# EAGLE board untitled (EAGLE 6.2), part 1 of 3
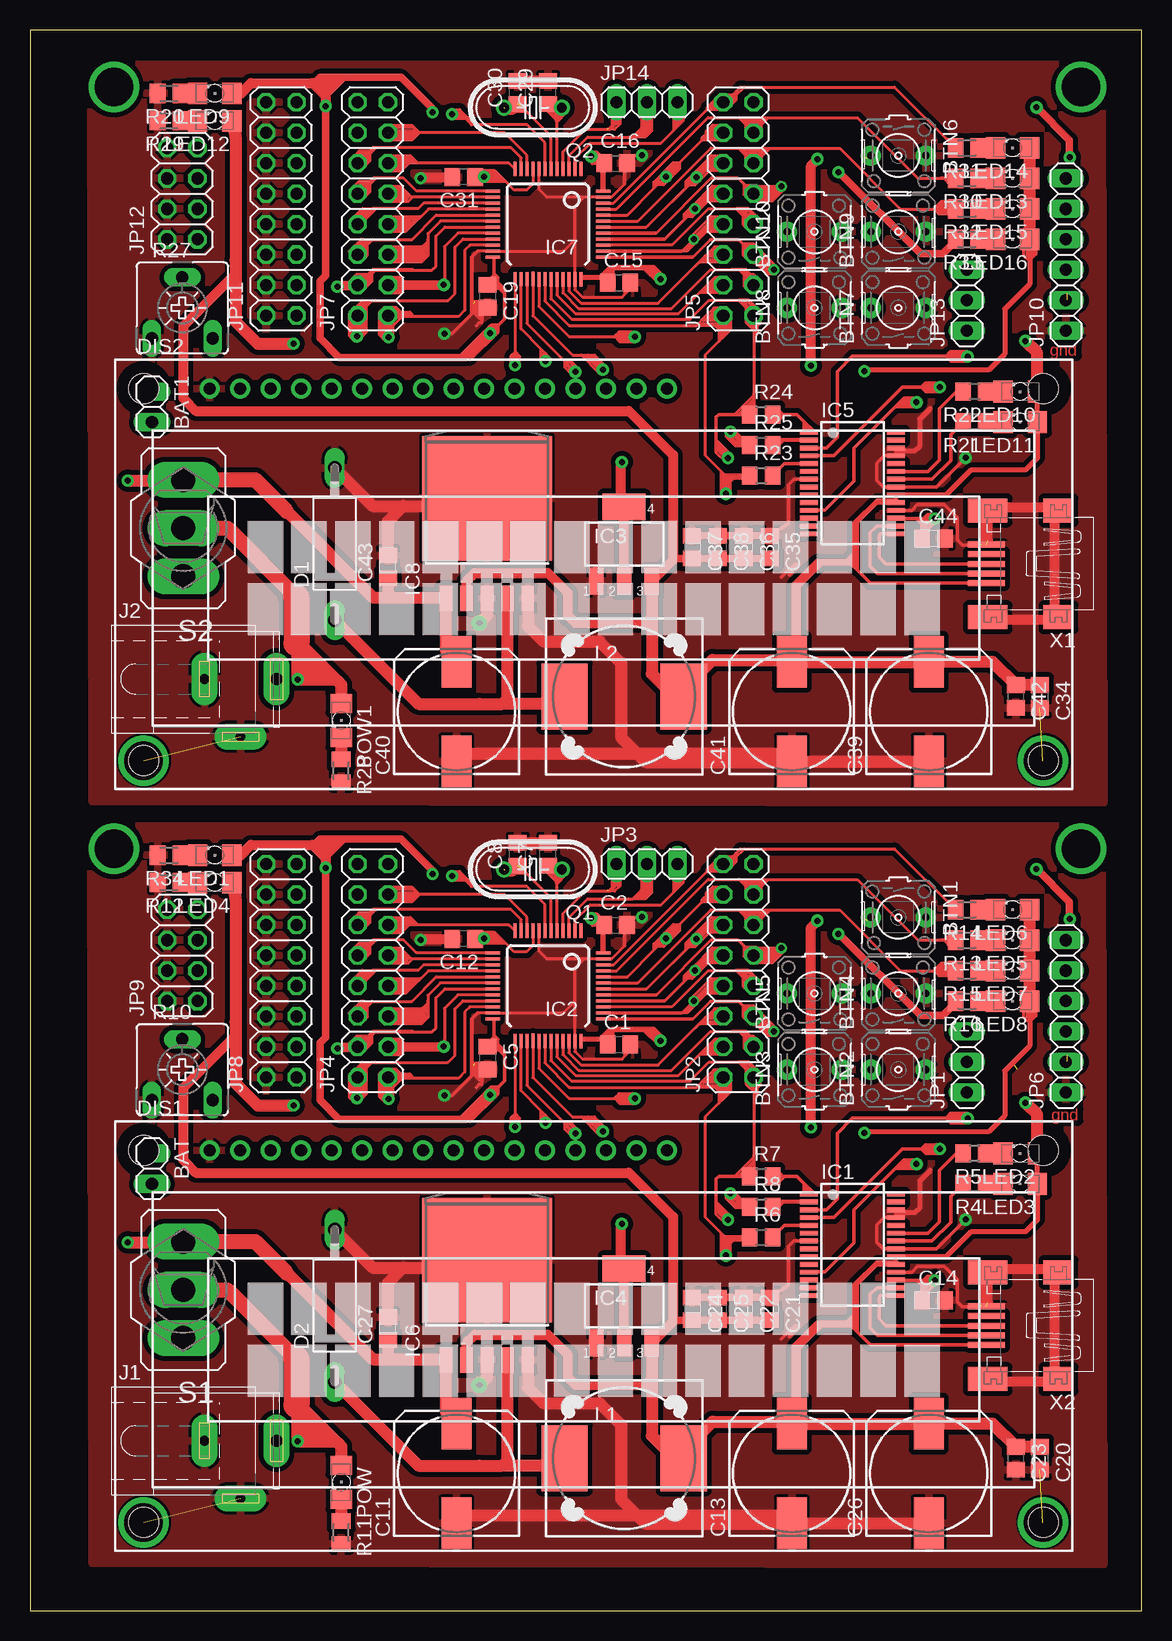
[diagram p0: board, top side]
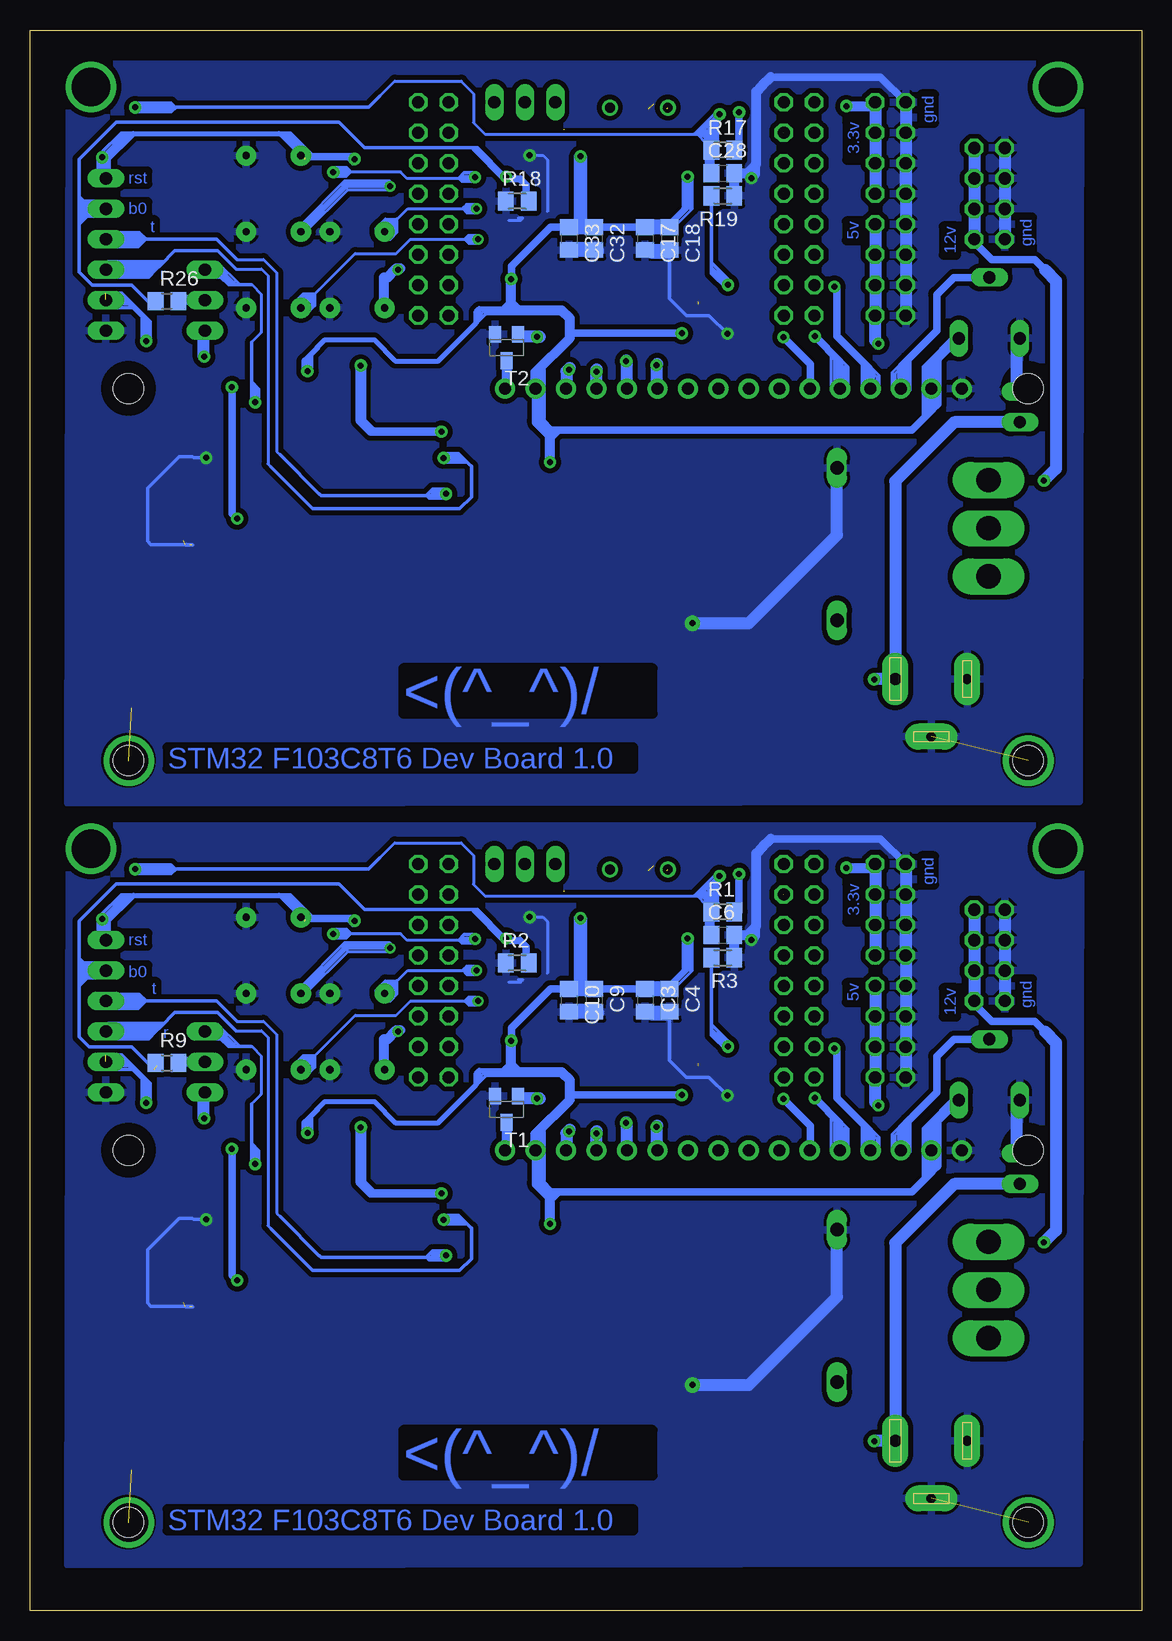
[diagram p1: board, bottom side, seen from below]

Size 92.69 x 131.75 mm. Coordinates in mm from the lower left corner, seen from the top.
Outline: 0,0 92.69,0 92.69,131.75 0,131.75 0,0
Copper layers (1*16): Top 0.035mm / dielectric 1.5mm / Bottom 0.035mm
Design rules: minimum track width 10mil, minimum drill 24mil, track to track 8mil, track to pad 8mil, pad to pad 8mil, via to via 8mil, smd to smd 8mil, copper to edge 40mil, drill to drill 8mil, minimum pad ring 10mil, minimum via ring 8mil, stop-mask expansion 4mil, vias tented up to drill 0mil, thermal gap 10mil

## Footprints (pad centres in the part's own frame; a part is rotated, then mirrored left to right if it is on the bottom)
1X02 = drill 1.016 long: 1 -1.27,0; 2 1.27,0
PUSHBUTTON = drill 0.6 pad 1.676: 1 0,2.286; 2 0,-2.286
C0805 = smd 1.3 x 1.5: 1 -0.95,0; 2 0.95,0
153CLV-1012 = smd 4.3 x 2.5: + 4.15,0; - -4.15,0
DO15-12 = drill 1.118 long: A 6.35,0; C -6.35,0
TUXGR_16X2_R2 = drill 1 pad 1.676: 1 -32,15.5; 2 -29.46,15.5; 3 -26.92,15.5; 4 -24.38,15.5; 5 -21.84,15.5; 6 -19.3,15.5; 7 -16.76,15.5; 8 -14.22,15.5; 9 -11.68,15.5; 10 -9.14,15.5; 11 -6.6,15.5; 12 -4.06,15.5; 13 -1.52,15.5; 14 1.02,15.5; 15 3.56,15.5; 16 6.1,15.5 | hole 2.5: -37.5,-15.5; 37.5,-15.5; -37.5,15.5; 37.5,15.5
SSOP28 = smd 0.4 x 1.5: 1 -4.225,-3.625; 2 -3.575,-3.625; 3 -2.925,-3.625; 4 -2.275,-3.625; 5 -1.625,-3.625; 6 -0.975,-3.625; 7 -0.325,-3.625; 8 0.325,-3.625; 9 0.975,-3.625; 10 1.625,-3.625; 11 2.275,-3.625; 12 2.925,-3.625; 13 3.575,-3.625; 14 4.225,-3.625; 15 4.225,3.625; 16 3.575,3.625; 17 2.925,3.625; 18 2.275,3.625; 19 1.625,3.625; 20 0.975,3.625; 21 0.325,3.625; 22 -0.325,3.625; 23 -0.975,3.625; 24 -1.625,3.625; 25 -2.275,3.625; 26 -2.925,3.625; 27 -3.575,3.625; 28 -4.225,3.625
TQFP48 = smd 0.2 x 1: 1 -2.75,-4.5; 2 -2.25,-4.5; 3 -1.75,-4.5; 4 -1.25,-4.5; 5 -0.75,-4.5; 6 -0.25,-4.5; 7 0.25,-4.5; 8 0.75,-4.5; 9 1.25,-4.5; 10 1.75,-4.5; 11 2.25,-4.5; 12 2.75,-4.5; 25 2.75,4.495; 26 2.25,4.494; 27 1.751,4.515; 28 1.25,4.482; 29 0.753,4.499; 30 0.251,4.494; 31 -0.25,4.496; 32 -0.751,4.506; 33 -1.258,4.496; 34 -1.75,4.5; 35 -2.25,4.5; 36 -2.75,4.5; 49 0.752,4.496; 50 0.248,4.497; 51 -0.25,4.497; 52 -0.748,4.497; 53 2.75,4.495; 54 2.252,4.492; 55 1.749,4.5; 56 1.249,4.485 | smd 1 x 0.2: 13 4.5,-2.75; 14 4.5,-2.25; 15 4.5,-1.75; 16 4.5,-1.25; 17 4.5,-0.75; 18 4.5,-0.25; 19 4.5,0.25; 20 4.5,0.75; 21 4.5,1.25; 22 4.5,1.75; 23 4.5,2.25; 24 4.5,2.75; 37 -4.5,2.75; 38 -4.5,2.25; 39 -4.5,1.75; 40 -4.5,1.25; 41 -4.5,0.75; 42 -4.5,0.25; 43 -4.5,-0.25; 44 -4.5,-0.75; 45 -4.5,-1.25; 46 -4.5,-1.75; 47 -4.5,-2.25; 48 -4.5,-2.75; 57 -4.5,2.75; 58 -4.5,2.25; 59 -4.5,1.75; 60 -4.5,1.25; 61 -4.5,0.75; 62 -4.5,0.25; 63 -4.5,-0.25; 64 -4.5,-0.75; 65 -4.5,-1.25; 66 -4.5,-1.75; 67 -4.5,-2.25; 68 -4.5,-2.75 | smd 0.25 x 1.2: P$1 -2.75,4.597; P$2 -2.248,4.597; P$3 -1.753,4.597; P$4 -1.257,4.597; P$5 -0.749,4.597; P$6 -0.25,4.597; P$7 0.25,4.594; P$8 0.749,4.597; P$9 1.247,4.585; P$10 1.753,4.595; P$11 2.25,4.59; P$12 2.75,4.597; P$25 -2.753,-4.599; P$26 -2.25,-4.599; P$27 -1.751,-4.599; P$28 -1.25,-4.599; P$29 -0.753,-4.599; P$30 -0.251,-4.599; P$31 0.248,-4.6; P$32 0.745,-4.599; P$33 1.248,-4.599; P$34 1.746,-4.599; P$35 2.248,-4.602; P$36 2.746,-4.599 | smd 1.2 x 0.25: P$13 4.599,-2.753; P$14 4.599,-2.25; P$15 4.599,-1.751; P$16 4.599,-1.25; P$17 4.599,-0.753; P$18 4.599,-0.251; P$19 4.6,0.248; P$20 4.599,0.745; P$21 4.599,1.248; P$22 4.599,1.746; P$23 4.602,2.248; P$24 4.599,2.746; P$37 -4.599,2.75; P$38 -4.599,2.247; P$39 -4.599,1.748; P$40 -4.599,1.246; P$41 -4.599,0.749; P$42 -4.599,0.248; P$43 -4.6,-0.251; P$44 -4.599,-0.749; P$45 -4.599,-1.252; P$46 -4.599,-1.75; P$47 -4.602,-2.252; P$48 -4.599,-2.75
SOT223 = smd 1.219 x 2.235: 1 -2.311,-3.099; 2 0,-3.099; 3 2.311,-3.099 | smd 3.6 x 2.2: 4 0,3.099
TO263-5 = smd 1.067 x 2.159: 1 -3.404,-5.791; 2 -1.702,-5.791; 3 0,-5.791; 4 1.702,-5.791; 5 3.404,-5.791 | smd 10.8 x 10.41: 6 0,2.54
SPC4078 = drill 0.8 pad 2.184 long: 1 -3,0; 2 0,-4.8 | drill 1 pad 2.184 long: 3 3,0
1X03 = drill 1.016 long: 1 -2.54,0; 2 0,0; 3 2.54,0
2X08 = drill 1.016 octagon: 1 -8.89,-1.27; 2 -8.89,1.27; 3 -6.35,-1.27; 4 -6.35,1.27; 5 -3.81,-1.27; 6 -3.81,1.27; 7 -1.27,-1.27; 8 -1.27,1.27; 9 1.27,-1.27; 10 1.27,1.27; 11 3.81,-1.27; 12 3.81,1.27; 13 6.35,-1.27; 14 6.35,1.27; 15 8.89,-1.27; 16 8.89,1.27
1X06 = drill 1.016 long: 1 -6.35,0; 2 -3.81,0; 3 -1.27,0; 4 1.27,0; 5 3.81,0; 6 6.35,0
2X04 = drill 1.016 octagon: 1 -3.81,-1.27; 2 -3.81,1.27; 3 -1.27,-1.27; 4 -1.27,1.27; 5 1.27,-1.27; 6 1.27,1.27; 7 3.81,-1.27; 8 3.81,1.27
DR127 = smd 3.85 x 5.5: 1 -4.975,0; 2 4.975,0
1206 = smd 1.6 x 1.803: A -1.422,0; C 1.422,0
HC49U-V = drill 0.813: 1 -2.413,0; 2 2.413,0
M0805 = smd 1.3 x 1.6: 1 -0.95,0; 2 0.95,0
R0805 = smd 1.3 x 1.5: 1 -0.95,0; 2 0.95,0
CA6V = drill 1.016 long: A -2.54,-2.54; E 2.54,-2.54; S 0,2.54
320-916 = drill 2.007 long: 1 0,4.013; 2 0,0; 3 0,-4.013
SOT23-BEC = smd 1 x 1.4: B -0.95,-1.1; C 0,1.1; E 0.95,-1.1
32005-400 = smd 3.1 x 0.5: 1 3,1.6; 2 3,0.8; 3 3,0; 4 3,-0.8; 5 3,-1.6 | smd 2.5 x 2: M1 -3,-4.45; M2 -3,4.45 | smd 3.3 x 2: M3 2.9,4.45; M4 2.9,-4.45

## Placement (x,y rotation side)
BAT  [1X02]  10.16,36.83 270 top
BAT1  [1X02]  10.16,100.33 270 top
BTN1  PUSHBTN  [PUSHBUTTON]  72.39,57.78 270 top
BTN2  PUSHBTN  [PUSHBUTTON]  72.39,45.09 90 top
BTN3  PUSHBTN  [PUSHBUTTON]  65.41,45.09 90 top
BTN4  PUSHBTN  [PUSHBUTTON]  72.39,51.44 90 top
BTN5  PUSHBTN  [PUSHBUTTON]  65.41,51.44 90 top
BTN6  PUSHBTN  [PUSHBUTTON]  72.39,121.28 270 top
BTN7  PUSHBTN  [PUSHBUTTON]  72.39,108.59 90 top
BTN8  PUSHBTN  [PUSHBUTTON]  65.41,108.59 90 top
BTN9  PUSHBTN  [PUSHBUTTON]  72.39,114.94 90 top
BTN10  PUSHBTN  [PUSHBUTTON]  65.41,114.94 90 top
C1  100n  [C0805]  49.1,47.18 0 top
C2  100n  [C0805]  48.82,57.13 0 top
C3  100n  [C0805]  41.4,50.86 270 bottom
C4  100n  [C0805]  39.37,50.86 270 bottom
C5  10u  [C0805]  38.15,46.05 270 top
C6  [C0805]  34.92,56.32 0 bottom
C7  24p  [C0805]  43.2,63.05 90 top
C8  24p  [C0805]  40.66,63.05 90 top
C9  10u  [C0805]  45.66,50.86 270 bottom
C10  10u  [C0805]  47.75,50.86 270 bottom
C11  [153CLV-1012]  35.56,11.43 90 top
C12  10u  [C0805]  36.16,55.99 180 top
C13  [153CLV-1012]  63.5,11.43 90 top
C14  [C0805]  75.34,25.84 0 top
C15  100n  [C0805]  49.1,110.68 0 top
C16  100n  [C0805]  48.82,120.63 0 top
C17  100n  [C0805]  41.4,114.36 270 bottom
C18  100n  [C0805]  39.37,114.36 270 bottom
C19  10u  [C0805]  38.15,109.55 270 top
C20  10u  [C0805]  84.2,12.7 270 top
C21  [C0805]  61.68,25.15 270 top
C22  [C0805]  59.52,25.15 270 top
C23  [C0805]  82.17,12.7 270 top
C24  [C0805]  55.21,25.15 270 top
C25  [C0805]  57.37,25.15 270 top
C26  100u  [153CLV-1012]  74.93,11.43 90 top
C27  [C0805]  29.84,23.5 90 top
C28  [C0805]  34.92,119.82 0 bottom
C29  24p  [C0805]  43.2,126.55 90 top
C30  24p  [C0805]  40.66,126.55 90 top
C31  10u  [C0805]  36.16,119.49 180 top
C32  10u  [C0805]  45.66,114.36 270 bottom
C33  10u  [C0805]  47.75,114.36 270 bottom
C34  10u  [C0805]  84.2,76.2 270 top
C35  [C0805]  61.68,88.65 270 top
C36  [C0805]  59.52,88.65 270 top
C37  [C0805]  55.21,88.65 270 top
C38  [C0805]  57.37,88.65 270 top
C39  100u  [153CLV-1012]  74.93,74.93 90 top
C40  [153CLV-1012]  35.56,74.93 90 top
C41  [153CLV-1012]  63.5,74.93 90 top
C42  [C0805]  82.17,76.2 270 top
C43  [C0805]  29.84,87 90 top
C44  [C0805]  75.34,89.34 0 top
D1  1N5060GP  [DO15-12]  25.4,88.9 90 top
D2  1N5060GP  [DO15-12]  25.4,25.4 90 top
DIS1  TUXGR_16X2_R2  [TUXGR_16X2_R2]  46.99,22.86 0 top
DIS2  TUXGR_16X2_R2  [TUXGR_16X2_R2]  46.99,86.36 0 top
IC1  FT232RL  [SSOP28]  68.58,30.48 270 top
IC2  STM32F10XCXT6  [TQFP48]  43.18,52.07 180 top
IC3  [SOT223]  49.53,88.9 0 top
IC4  [SOT223]  49.53,25.4 0 top
IC5  FT232RL  [SSOP28]  68.58,93.98 270 top
IC6  [TO263-5]  38.1,26.67 0 top
IC7  STM32F10XCXT6  [TQFP48]  43.18,115.57 180 top
IC8  [TO263-5]  38.1,90.17 0 top
J1  [SPC4078]  17.55,14.15 0 top
J2  [SPC4078]  17.55,77.65 0 top
JP1  [1X03]  78.11,45.72 90 top
JP2  [2X08]  59.05,53.34 90 top
JP3  [1X03]  51.44,62.23 0 top
JP4  [2X08]  28.58,53.34 90 top
JP5  [2X08]  59.05,116.84 90 top
JP6  [1X06]  86.36,49.53 90 top
JP7  [2X08]  28.58,116.84 90 top
JP8  [2X08]  20.95,53.34 90 top
JP9  [2X04]  12.7,54.61 90 top
JP10  [1X06]  86.36,113.03 90 top
JP11  [2X08]  20.95,116.84 90 top
JP12  [2X04]  12.7,118.11 90 top
JP13  [1X03]  78.11,109.22 90 top
JP14  [1X03]  51.44,125.73 0 top
L1  DR127  [DR127]  49.53,12.7 0 top
L2  DR127  [DR127]  49.53,76.2 0 top
LED1  [1206]  15.41,62.97 180 top
LED2  [1206]  82.55,38.1 180 top
LED3  [1206]  82.55,35.56 180 top
LED4  [1206]  15.41,60.68 180 top
LED5  [1206]  81.91,55.88 180 top
LED6  [1206]  81.91,58.42 180 top
LED7  [1206]  81.91,53.34 180 top
LED8  [1206]  81.91,50.8 180 top
LED9  [1206]  15.41,126.47 180 top
LED10  [1206]  82.55,101.6 180 top
LED11  [1206]  82.55,99.06 180 top
LED12  [1206]  15.41,124.18 180 top
LED13  [1206]  81.91,119.38 180 top
LED14  [1206]  81.91,121.92 180 top
LED15  [1206]  81.91,116.84 180 top
LED16  [1206]  81.91,114.3 180 top
POW  [1206]  25.95,10.69 270 top
POW1  [1206]  25.95,74.19 270 top
Q1  [HC49U-V]  41.93,61.78 180 top
Q2  [HC49U-V]  41.93,125.28 180 top
R1  [M0805]  34.92,58.23 0 bottom
R2  [M0805]  52.07,53.97 0 bottom
R3  [M0805]  34.92,54.42 180 bottom
R4  [R0805]  78.74,35.56 180 top
R5  [R0805]  78.74,38.1 180 top
R6  [R0805]  60.96,31.12 0 top
R7  [R0805]  60.96,36.2 0 top
R8  [R0805]  60.96,33.66 0 top
R9  [R0805]  81.26,45.65 0 bottom
R10  [CA6V]  12.7,45.09 0 top
R11  [M0805]  25.95,6.5 270 top
R12  [M0805]  11.6,60.68 180 top
R13  [M0805]  78.11,55.88 180 top
R14  [M0805]  78.11,58.42 180 top
R15  [M0805]  78.11,53.34 180 top
R16  [M0805]  78.11,50.8 180 top
R17  [M0805]  34.92,121.73 0 bottom
R18  [M0805]  52.07,117.47 0 bottom
R19  [M0805]  34.92,117.92 180 bottom
R20  [M0805]  11.6,126.47 180 top
R21  [R0805]  78.74,99.06 180 top
R22  [R0805]  78.74,101.6 180 top
R23  [R0805]  60.96,94.61 0 top
R24  [R0805]  60.96,99.7 0 top
R25  [R0805]  60.96,97.16 0 top
R26  [R0805]  81.26,109.15 0 bottom
R27  [CA6V]  12.7,108.59 0 top
R28  [M0805]  25.95,70 270 top
R29  [M0805]  11.6,124.18 180 top
R30  [M0805]  78.11,119.38 180 top
R31  [M0805]  78.11,121.92 180 top
R32  [M0805]  78.11,116.84 180 top
R33  [M0805]  78.11,114.3 180 top
R34  [M0805]  11.6,62.97 180 top
S1  [320-916]  12.78,26.72 180 top
S2  [320-916]  12.78,90.22 180 top
T1  [SOT23-BEC]  52.96,41.78 180 bottom
T2  [SOT23-BEC]  52.96,105.28 180 bottom
X1  MINI-USB_SHIELD5P4-32005-400  [32005-400]  82.74,87.25 180 top
X2  MINI-USB_SHIELD5P4-32005-400  [32005-400]  82.74,23.75 180 top

## Library data of the parts
BAT BAT1 JP1-JP14 = pinhead
BTN1-BTN10 = switch-omron
C1-C44 R1-R9 R11-R26 R28-R34 = rcl
D1 D2 = diode
DIS1 DIS2 = display-lcd; OC_FARNELL: unknown; OC_NEWARK: unknown
IC1 IC5 = ftdichip; MPN: FT232RL; OC_FARNELL: 1146032; OC_NEWARK: 91K9918
IC2 IC7 = stm32
IC3 IC4 = v-reg-3
IC6 IC8 = linear
J1 J2 = con-jack; OC_FARNELL: unknown; OC_NEWARK: unknown
L1 L2 = inductors
LED1-LED16 POW POW1 = led
Q1 Q2 = crystal; OC_FARNELL: 1666969; OC_NEWARK: unknown
R10 R27 = pot
S1 S2 = switch
T1 T2 = transistor
X1 X2 = con-cypressindustries; OC_FARNELL: unknown; OC_NEWARK: unknown

## Nets
12V: C11.+ C27.1 IC6.1 JP9.1 JP9.3 JP9.5 JP9.7 S1.3
12V1: C40.+ C43.1 IC8.1 JP12.1 JP12.3 JP12.5 JP12.7 S2.3
A0: IC2.10
A1: IC2.11
A2: IC2.12
A3: IC2.13
A4: IC2.14
A5: IC2.15
A6: IC2.16
A7: IC2.17
A8: IC2.29 T1.B
A9: IC7.15
A10: IC7.16
A11: IC2.32
A12: IC2.33
A13: IC2.34
A14: BTN3.1 IC2.37
A15: BTN2.1 IC2.38
A16: IC7.17
A17: IC7.10
A18: IC7.11
A19: IC7.12
A20: IC7.13
A21: IC7.29 T2.B
A22: IC7.32
A23: IC7.33
A24: IC7.34
A25: BTN8.1 IC7.37
A26: BTN7.1 IC7.38
A27: IC7.14
B0: IC2.18
B1: DIS1.4 IC2.19
B2: DIS2.5 IC7.21
B3: IC2.39
B4: BTN5.1 IC2.40
B5: BTN4.1 IC2.41
B6: IC2.42 R16.2
B7: IC2.43 R15.2
B8: IC2.45 R13.2
B9: IC2.46 R14.2
B10: DIS1.5 IC2.21
B11: DIS1.6 IC2.22
B12: DIS1.11 IC2.25
B13: DIS1.12 IC2.26
B14: DIS1.13 IC2.27
B15: DIS1.14 IC2.28
B16: IC7.45 R30.2
B17: IC7.46 R31.2
B18: DIS2.11 IC7.25
B19: DIS2.12 IC7.26
B20: DIS2.13 IC7.27
B21: DIS2.14 IC7.28
B22: IC7.18
B23: DIS2.4 IC7.19
B24: IC7.39
B25: BTN10.1 IC7.40
B26: BTN9.1 IC7.41
B27: IC7.42 R33.2
B28: IC7.43 R32.2
B29: DIS2.6 IC7.22
BOOT0: IC2.44 JP6.5 R2.2 R9.1
BOOT1: IC2.20 R3.2
BOOT2: IC7.44 JP10.5 R18.2 R26.1
BOOT3: IC7.20 R19.2
C1: IC7.2 JP14.3
C2: IC7.3 JP14.2
C3: IC7.4 JP14.1
C13: IC2.2 JP3.3
C14: IC2.3 JP3.2
C15: IC2.4 JP3.1
CTS: IC1.11 JP1.3
CTS1: IC5.11 JP13.3
CTS/RTS: JP1.2 R9.2
CTS/RTS1: JP13.2 R26.2
D+: IC1.15 X2.3
D+1: IC5.15 X1.3
D-: IC1.16 X2.2
D-1: IC5.16 X1.2
DTR_F: IC1.2 R8.2
DTR_F1: IC5.2 R25.2
GND: BAT.1 BTN1.1 BTN2.2 BTN3.2 BTN4.2 BTN5.2 C1.2 C2.2 C3.2 C4.2 C5.2 C6.2 C7.2 C8.2 C9.2 C10.2 C11.- C12.2 C13.- C14.2 C20.2 C21.1 C22.1 C23.2 C24.1 C25.1 C26.- C27.2 D2.A DIS1.1 IC1.7 IC1.18 IC1.21 IC1.25 IC1.26 IC2.8 IC2.23 IC2.35 IC2.47 IC4.1 IC6.3 IC6.5 IC6.6 J1.1 J1.2 JP6.1 JP8.2 JP8.4 JP8.6 JP8.8 JP8.10 JP8.12 JP8.14 JP8.16 JP9.2 JP9.4 JP9.6 JP9.8 R2.1 R3.1 R10.A R11.2 R12.2 R34.2 T1.E X2.5
GND1: BAT1.1 BTN6.1 BTN7.2 BTN8.2 BTN9.2 BTN10.2 C15.2 C16.2 C17.2 C18.2 C19.2 C28.2 C29.2 C30.2 C31.2 C32.2 C33.2 C34.2 C35.1 C36.1 C37.1 C38.1 C39.- C40.- C41.- C42.2 C43.2 C44.2 D1.A DIS2.1 IC3.1 IC5.7 IC5.18 IC5.21 IC5.25 IC5.26 IC7.8 IC7.23 IC7.35 IC7.47 IC8.3 IC8.5 IC8.6 J2.1 J2.2 JP10.1 JP11.2 JP11.4 JP11.6 JP11.8 JP11.10 JP11.12 JP11.14 JP11.16 JP12.2 JP12.4 JP12.6 JP12.8 R18.1 R19.1 R20.2 R27.A R28.2 R29.2 T2.E X1.5
N$1: LED2.C R5.1
N$2: LED3.C R4.1
N$3: BAT.2 J1.3 POW.A S1.2
N$4: IC1.23 R5.2
N$5: IC1.22 R4.2
N$6: LED4.C R12.1
N$7: DIS1.3 R10.S
N$8: LED5.C R13.1
N$9: LED6.C R14.1
N$10: LED7.C R15.1
N$11: LED8.C R16.1
N$15: DIS1.16 T1.C
N$17: D2.C IC6.4 L1.1
N$20: POW.C R11.1
N$38: JP2.1
N$39: JP2.3
N$40: JP2.5
N$41: JP2.7
N$42: JP2.9
N$43: JP2.11
N$44: JP2.13
N$45: JP2.15
N$54: JP2.2
N$55: JP2.4
N$56: JP2.6
N$57: JP2.8
N$58: JP2.10
N$59: JP2.12
N$60: JP2.14
N$61: JP2.16
N$70: JP4.1
N$71: JP4.3
N$72: JP4.5
N$73: JP4.7
N$74: JP4.9
N$75: JP4.11
N$76: JP4.13
N$77: JP4.15
N$78: JP4.2
N$79: JP4.4
N$81: JP4.8
N$82: JP4.10
N$83: JP4.12
N$84: JP4.14
N$85: JP4.16
N$86: LED1.C R34.1
N$87: JP4.6
N$261: LED9.C R20.1
N$265: JP5.1
N$278: JP5.3
N$279: JP5.5
N$280: JP5.7
N$281: JP5.9
N$282: JP5.11
N$283: JP5.13
N$284: JP5.15
N$285: JP5.2
N$286: JP5.4
N$287: JP5.6
N$288: JP5.8
N$289: JP5.10
N$290: JP5.12
N$291: JP5.14
N$292: JP5.16
N$293: JP7.1
N$294: JP7.3
N$295: JP7.5
N$296: JP7.7
N$297: JP7.9
N$298: JP7.11
N$299: JP7.13
N$300: JP7.15
N$301: JP7.2
N$302: JP7.4
N$303: JP7.8
N$304: JP7.10
N$305: JP7.12
N$306: JP7.14
N$307: JP7.16
N$308: IC5.23 R22.2
N$309: IC5.22 R21.2
N$310: LED10.C R22.1
N$311: LED11.C R21.1
N$312: DIS2.3 R27.S
N$313: DIS2.16 T2.C
N$314: POW1.C R28.1
N$315: BAT1.2 J2.3 POW1.A S2.2
N$316: LED12.C R29.1
N$317: LED13.C R30.1
N$318: LED14.C R31.1
N$319: LED15.C R32.1
N$320: LED16.C R33.1
N$321: D1.C IC8.4 L2.1
N$342: JP7.6
OSC_IN: C7.1 IC2.5 Q1.1
OSC_IN1: C29.1 IC7.5 Q2.1
OSC_OUT: C8.1 IC2.6 Q1.2
OSC_OUT1: C30.1 IC7.6 Q2.2
POWER: C14.1 IC1.4 IC1.17
POWER1: C44.1 IC5.4 IC5.17
RST: BTN1.2 C6.1 IC2.7 JP6.6 R1.1 R8.1
RST1: BTN6.2 C28.1 IC7.7 JP10.6 R17.1 R25.1
RTS: IC1.3 JP1.1
RTS1: IC5.3 JP13.1
RX_DWNLD: IC2.31 JP6.3 R7.1
RX_DWNLD1: IC7.31 JP10.3 R24.1
RX_F: IC1.5 R6.2
RX_F1: IC5.5 R23.2
TX_DWNLD: IC2.30 JP6.4 R6.1
TX_DWNLD1: IC7.30 JP10.4 R23.1
TX_F: IC1.1 R7.2
TX_F1: IC5.1 R24.2
VBAT: IC2.1
VBAT1: IC7.1
VCC: C13.+ C20.1 C21.2 C22.2 C23.1 C24.2 C25.2 C26.+ IC1.19 IC1.20 IC4.3 IC6.2 JP6.2 JP8.1 JP8.3 JP8.5 JP8.7 L1.2 LED2.A LED3.A LED4.A X2.1
VCC1: C34.1 C35.2 C36.2 C37.2 C38.2 C39.+ C41.+ C42.1 IC3.3 IC5.19 IC5.20 IC8.2 JP10.2 JP11.1 JP11.3 JP11.5 JP11.7 L2.2 LED10.A LED11.A LED12.A X1.1
VDD: C1.1 C2.1 C3.1 C4.1 C5.1 C9.1 C10.1 C12.1 DIS1.2 DIS1.15 IC2.9 IC2.24 IC2.36 IC2.48 IC4.2 JP8.9 JP8.11 JP8.13 JP8.15 LED1.A LED5.A LED6.A LED7.A LED8.A R1.2 R10.E
VDD1: C15.1 C16.1 C17.1 C18.1 C19.1 C31.1 C32.1 C33.1 DIS2.2 DIS2.15 IC3.2 IC7.9 IC7.24 IC7.36 IC7.48 JP11.9 JP11.11 JP11.13 JP11.15 LED9.A LED13.A LED14.A LED15.A LED16.A R17.2 R27.E

## Tracks (layer width: path | path; a pad name or v marks a point on that pad's centre or on a via)
12V  (via drill 0.5 pad 1.02)
  Top 1.016: 21.39,28.14 28.58,20.95 29.84,20.95 | 29.84,20.95 34.62,20.95 IC6.1 34.7,16.44 C11.+ | C27.1 29.84,20.95 | v8.15,30.7 12.74,30.7 S1.3
  Top 1.27: 21.39,28.14 18.8,30.73 S1.3
  Bottom 0.61: 8.06,48.23 8.93,49.1 12.52,49.1 13.97,50.55 JP9.1
  Bottom 1.016: JP9.7 JP9.5 JP9.3 JP9.1 | 8.06,48.23 7.16,47.33 7.16,31.69 v8.15,30.7
12V1  (via drill 0.5 pad 1.02)
  Top 1.016: 21.39,91.64 28.58,84.45 29.84,84.45 | 29.84,84.45 34.62,84.45 IC8.1 34.7,79.94 C40.+ | C43.1 29.84,84.45 | v8.15,94.2 12.74,94.2 S2.3
  Top 1.27: 21.39,91.64 18.8,94.23 S2.3
  Bottom 0.61: 8.06,111.73 8.93,112.6 12.52,112.6 13.97,114.05 JP12.1
  Bottom 1.016: JP12.7 JP12.5 JP12.3 JP12.1 | 8.06,111.73 7.16,110.83 7.16,95.19 v8.15,94.2
A8  (via drill 0.5 pad 1.02)
  Top 0.254: IC2.29 42.43,45.2 44.96,42.67 v50.42,42.67
  Bottom 0.305: v50.42,42.67 51.8,42.67 T1.B
A14  (via drill 0.5)
  Top 0.254: 60.29,49.58 59.45,50.42 | 59.45,50.42 59.09,50.78 56.72,50.78 55.26,49.32 IC2.37 | 59.45,50.42 59.45,49.49 60.06,48.88
  Top 0.305: v62.02,48.27 61.6,48.27 60.29,49.58
  Bottom 0.254: v62.02,48.27 v62.03,48.26 62.23,48.26 63.12,47.37 BTN3.1
A15  (via drill 0.5)
  Top 0.254: v55.33,50.79 54.36,49.82 IC2.38
  Bottom 0.254: BTN2.1 65.57,49.62 62.15,49.62 60.98,50.79 v55.33,50.79
A21  (via drill 0.5 pad 1.02)
  Top 0.254: IC7.29 42.43,108.7 44.96,106.17 v50.42,106.17
  Bottom 0.305: v50.42,106.17 51.8,106.17 T2.B
A25  (via drill 0.5)
  Top 0.254: 60.29,113.08 59.45,113.92 | 59.45,113.92 59.09,114.28 56.72,114.28 55.26,112.82 IC7.37 | 59.45,113.92 59.45,112.99 60.06,112.38
  Top 0.305: v62.02,111.77 61.6,111.77 60.29,113.08
  Bottom 0.254: v62.02,111.77 v62.03,111.76 62.23,111.76 63.12,110.87 BTN8.1
A26  (via drill 0.5)
  Top 0.254: v55.33,114.29 54.36,113.32 IC7.38
  Bottom 0.254: BTN7.1 65.57,113.12 62.15,113.12 60.98,114.29 v55.33,114.29
B1  (via drill 0.5 pad 1.02)
  Top 0.254: 31.94,48.26 28.56,48.26 28.54,48.23 | 27.28,46.98 28.54,48.23 | 28.54,48.23 28.83,48.23 | 28.83,48.23 33.54,48.23 33.85,48.54 33.85,51.08 34.59,51.82 IC2.19 | 28.35,47.77 28.36,47.77 28.83,48.23
  Top 0.61: v25.63,46.85 27.15,46.85 27.28,46.98
  Bottom 0.254: DIS1.4 22.61,39.74
  Bottom 0.61: 22.61,39.74 22.61,38.41 22.71,38.32 22.71,40.03 25.42,42.75 25.42,46.65 v25.63,46.85
B2  (via drill 0.5 pad 1.02)
  Top 0.254: 27.29,107.96 28.54,109.21 | 28.54,109.21 28.79,109.21 34.84,109.21 35.42,109.79 35.42,113.65 36.09,114.32 IC7.21 | 28.04,108.66 28.04,106.53 27.36,105.84 27.06,105.84 26.66,106.25 26.66,108.14 27.72,109.21 28.54,109.21
  Top 0.61: v27.25,106.21 27.25,107.92 27.29,107.96
  Bottom 0.61: DIS2.5 25.15,104.11 v27.25,106.21
B4  (via drill 0.5)
  Top 0.254: v55.45,53.35 54.77,52.68 | 54.56,52.46 52.91,50.82 IC2.40 | 55.44,53.35 55.44,53.38 55.22,53.59 | 55.22,53.59 55.33,53.71 56.86,55.23 57.91,55.23 57.84,55.16 57.84,53.97 56.52,53.97 55.22,52.68 54.77,52.68 | 54.77,52.68 54.56,52.46 | 54.56,52.46 54.56,52.93 55.22,53.59
  Bottom 0.254: BTN5.1 62.41,52.15 | 62.41,52.15 61.2,53.35 v55.45,53.35 | 62.41,52.15 62.41,51.03 62.65,50.79 63.02,50.79 63.84,51.61 63.84,51.71 63.07,52.49 62.13,52.49 62.13,51.36 62.67,50.81 62.67,51.71 62.24,52.15 62.24,51.47 62.59,51.13 62.59,51.78 62.51,51.85 62.51,52.25 62.45,52.31 63,52.31 63.12,52.2 63.21,52.2 63.68,51.73 62.98,51.03 62.95,51.03 62.86,50.94 62.86,51.84 62.59,52.12 62.99,52.12 63.44,51.68 63.45,51.68 63.46,51.66 63.31,51.66 63.19,51.55 63.19,51.6 62.84,51.96 62.84,51.3 63.13,51 63.13,51.23 63.05,51.31
B5  (via drill 0.5)
  Top 0.254: v62.66,55.21 62.03,54.59 60.33,54.59 60.28,54.63 60.27,54.63 59.02,55.88 56.78,55.88 56.78,55.89 52.22,51.32 IC2.41
  Bottom 0.254: BTN4.1 66.33,55.21 v62.66,55.21
B6  (via drill 0.5 pad 1.02)
  Top 0.254: 76.83,50.8 R16.2 77.16,50.56 76.09,49.5 74.31,49.5 v67.41,56.4 | IC2.42 51.39,51.82 56.68,57.11 56.68,57.09 v55.58,55.99
  Bottom 0.254: v55.58,55.99 55.7,55.87 61.25,55.87 61.78,56.4 v67.41,56.4
B7
  Top 0.254: IC2.43 50.68,52.32 56.76,58.39 61.71,58.39 | 61.71,58.39 67.51,58.39 72.57,53.33 77.14,53.33 R15.2 | 60.43,57.14 60.97,57.14 60.98,57.12 60.98,57.67 61.71,58.39
B8
  Top 0.254: IC2.45 48.9,53.32 56.52,60.94 61.58,60.94 | 61.58,60.94 68.99,60.94 74.04,55.89 R13.2 | 61,59.55 61,60.35 61.58,60.94
B9
  Top 0.254: IC2.46 48.66,53.82 57.07,62.23 57.96,62.23 59.23,63.5 59.55,63.5 | 59.55,63.5 72.08,63.5 R14.2 | 58.69,62.8 58.85,62.8 59.55,63.5
B10  (via drill 0.5 pad 1.02)
  Top 0.254: 27.29,44.46 28.54,45.71 | 28.54,45.71 28.79,45.71 34.84,45.71 35.42,46.29 35.42,50.15 36.09,50.82 IC2.21 | 28.04,45.16 28.04,43.03 27.36,42.34 27.06,42.34 26.66,42.75 26.66,44.64 27.72,45.71 28.54,45.71
  Top 0.61: v27.25,42.71 27.25,44.43 27.29,44.46
  Bottom 0.61: DIS1.5 25.15,40.61 v27.25,42.71
B11  (via drill 0.5 pad 1.02)
  Top 0.254: IC2.22 36.68,50.32 36.25,49.89 36.25,44.89 35.71,44.36 31.01,44.36 | 31.01,44.36 29.9,44.36 29.82,44.36 29.79,44.39 | 30.09,42.61 30.28,42.61 30.28,43.62 31.01,44.36 | 31.01,44.36 31.01,44.65 30.56,45.11 | 30.56,45.07 30.56,45.11 | 30.56,45.11 29.52,45.11 29.12,44.72 29.12,42.85 29.66,42.32 29.66,44.49 30.1,44.93 30.5,44.93 30.85,44.59 30.85,44.49 30.24,43.88 30.24,44.09 30.63,44.49 30.26,44.86 29.77,44.86 29.76,44.87 29.76,43.02 29.49,42.75 29.49,44.82 29.64,44.97 29.98,44.97 30.4,44.55 30.11,44.55 29.95,44.72 29.53,44.72 29.52,44.7 29.34,44.7 29.29,44.65 29.29,42.88 29.39,42.77
  Top 0.61: v29.88,42.63 29.88,44.35 29.9,44.36
  Bottom 0.254: 27.63,38.41 DIS1.6
  Bottom 0.61: 27.63,38.41 27.63,40.39 v29.88,42.63
B12  (via drill 0.5 pad 1.02)
  Top 0.254: IC2.25 40.43,40.34 v40.45,40.32
  Top 0.305: 40.42,40.36 v40.45,40.32
  Bottom 0.305: v40.45,40.32 40.45,38.42 DIS1.11
B13  (via drill 0.5 pad 1.02)
  Top 0.254: IC2.26 40.93,43.33 42.62,41.64 | v42.99,40.64 42.99,41.27 | 42.99,41.27 42.62,41.64 | 43,40.55 42.93,40.63 42.62,40.63 42.62,41.64 | 42.99,41.27 43.37,40.89 43.37,40.5 42.77,41.1 42.77,41.25 42.85,41.17 42.85,40.75 43.02,40.92 43.12,40.92 43.22,40.82 43.22,40.8
  Bottom 0.305: v42.99,40.64 42.99,38.42 DIS1.12
B14  (via drill 0.5 pad 1.02)
  Top 0.254: IC2.27 41.43,43.79 44.58,40.64 | 44.58,40.64 v45.47,39.75 | 45.48,39.7 45.77,39.99 45.12,40.64 44.58,40.64 | 44.58,40.64 44.58,40.13 45.34,39.37 45.34,39.6 45.29,39.65 45.29,39.74 44.64,40.39 44.65,40.39 44.88,40.62
  Bottom 0.305: v45.47,39.75 DIS1.13
B15  (via drill 0.5 pad 1.02)
  Top 0.254: IC2.28 41.93,44.43 45.21,41.15 45.96,41.15 | 45.96,41.15 46.55,41.15 | 46.55,41.15 v47.75,39.94 | 47.7,39.89 47.48,39.68 47.48,39.62 45.96,41.15 | 46.55,41.15 47.08,41.15 48.03,40.2 48.03,40.16 47.93,40.06 47.87,40.06 46.93,41 46.39,41 46.38,40.98 46.46,40.98 47.5,39.94
  Bottom 0.305: v47.75,39.94 48.01,39.68 DIS1.14
B16
  Top 0.254: IC7.45 48.9,116.82 56.52,124.44 61.58,124.44 | 61.58,124.44 68.99,124.44 74.04,119.39 R30.2 | 61,123.05 61,123.85 61.58,124.44
B17
  Top 0.254: IC7.46 48.66,117.32 57.07,125.73 57.96,125.73 59.23,127 59.55,127 | 59.55,127 72.08,127 R31.2 | 58.69,126.3 58.85,126.3 59.55,127
B18  (via drill 0.5 pad 1.02)
  Top 0.254: IC7.25 40.43,103.84 v40.45,103.82
  Top 0.305: 40.42,103.86 v40.45,103.82
  Bottom 0.305: v40.45,103.82 40.45,101.92 DIS2.11
B19  (via drill 0.5 pad 1.02)
  Top 0.254: IC7.26 40.93,106.84 42.62,105.14 | v42.99,104.14 42.99,104.78 | 42.99,104.78 42.62,105.14 | 43,104.05 42.93,104.13 42.62,104.13 42.62,105.14 | 42.99,104.78 43.37,104.39 43.37,104 42.77,104.6 42.77,104.75 42.85,104.67 42.85,104.25 43.02,104.42 43.12,104.42 43.22,104.32 43.22,104.31
  Bottom 0.305: v42.99,104.14 42.99,101.92 DIS2.12
B20  (via drill 0.5 pad 1.02)
  Top 0.254: IC7.27 41.43,107.29 44.58,104.14 | 44.58,104.14 v45.47,103.25 | 45.48,103.2 45.77,103.49 45.12,104.14 44.58,104.14 | 44.58,104.14 44.58,103.63 45.34,102.87 45.34,103.1 45.29,103.15 45.29,103.24 44.64,103.89 44.65,103.89 44.88,104.11
  Bottom 0.305: v45.47,103.25 DIS2.13
B21  (via drill 0.5 pad 1.02)
  Top 0.254: IC7.28 41.93,107.93 45.21,104.65 45.96,104.65 | 45.96,104.65 46.55,104.65 | 46.55,104.65 v47.75,103.44 | 47.7,103.39 47.48,103.17 47.48,103.12 45.96,104.65 | 46.55,104.65 47.08,104.65 48.03,103.7 48.03,103.66 47.93,103.56 47.87,103.56 46.93,104.5 46.39,104.5 46.38,104.48 46.46,104.48 47.5,103.44
  Bottom 0.305: v47.75,103.44 48.01,103.18 DIS2.14
B23  (via drill 0.5 pad 1.02)
  Top 0.254: 31.94,111.76 28.56,111.76 28.54,111.73 | 27.28,110.48 28.54,111.73 | 28.54,111.73 28.83,111.73 | 28.83,111.73 33.54,111.73 33.85,112.04 33.85,114.58 34.59,115.32 IC7.19 | 28.35,111.27 28.36,111.27 28.83,111.73
  Top 0.61: v25.63,110.35 27.15,110.35 27.28,110.48
  Bottom 0.254: DIS2.4 22.61,103.24
  Bottom 0.61: 22.61,103.24 22.61,101.91 22.71,101.82 22.71,103.53 25.42,106.25 25.42,110.15 v25.63,110.35
B25  (via drill 0.5)
  Top 0.254: v55.45,116.85 54.77,116.18 | 54.56,115.96 52.91,114.32 IC7.40 | 55.44,116.85 55.44,116.88 55.22,117.09 | 55.22,117.09 55.33,117.21 56.86,118.73 57.91,118.73 57.84,118.66 57.84,117.47 56.52,117.47 55.22,116.18 54.77,116.18 | 54.77,116.18 54.56,115.96 | 54.56,115.96 54.56,116.43 55.22,117.09
  Bottom 0.254: BTN10.1 62.41,115.65 | 62.41,115.65 61.2,116.85 v55.45,116.85 | 62.41,115.65 62.41,114.53 62.65,114.29 63.02,114.29 63.84,115.11 63.84,115.21 63.07,115.99 62.13,115.99 62.13,114.86 62.67,114.31 62.67,115.21 62.24,115.65 62.24,114.97 62.59,114.63 62.59,115.28 62.51,115.35 62.51,115.75 62.45,115.81 63,115.81 63.12,115.7 63.21,115.7 63.68,115.23 62.98,114.53 62.95,114.53 62.86,114.44 62.86,115.34 62.59,115.62 62.99,115.62 63.44,115.18 63.45,115.18 63.46,115.16 63.31,115.16 63.19,115.05 63.19,115.1 62.84,115.46 62.84,114.79 63.13,114.5 63.13,114.73 63.05,114.81
B26  (via drill 0.5)
  Top 0.254: v62.66,118.71 62.03,118.09 60.33,118.09 60.28,118.13 60.27,118.13 59.02,119.38 56.78,119.38 56.78,119.39 52.22,114.82 IC7.41
  Bottom 0.254: BTN9.1 66.33,118.71 v62.66,118.71
B27  (via drill 0.5 pad 1.02)
  Top 0.254: 76.83,114.3 R33.2 77.16,114.06 76.09,113 74.31,113 v67.41,119.9 | IC7.42 51.39,115.32 56.68,120.61 56.68,120.59 v55.58,119.49
  Bottom 0.254: v55.58,119.49 55.7,119.37 61.25,119.37 61.78,119.9 v67.41,119.9
B28
  Top 0.254: IC7.43 50.68,115.82 56.76,121.9 61.71,121.9 | 61.71,121.9 67.51,121.9 72.57,116.83 77.14,116.83 R32.2 | 60.43,120.64 60.97,120.64 60.98,120.62 60.98,121.17 61.71,121.9
B29  (via drill 0.5 pad 1.02)
  Top 0.254: IC7.22 36.68,113.82 36.25,113.39 36.25,108.39 35.71,107.86 31.01,107.86 | 31.01,107.86 29.9,107.86 29.82,107.86 29.79,107.89 | 30.09,106.11 30.28,106.11 30.28,107.12 31.01,107.86 | 31.01,107.86 31.01,108.15 30.56,108.61 | 30.56,108.57 30.56,108.61 | 30.56,108.61 29.52,108.61 29.12,108.22 29.12,106.35 29.66,105.82 29.66,107.99 30.1,108.43 30.5,108.43 30.85,108.09 30.85,107.99 30.24,107.38 30.24,107.59 30.63,107.99 30.26,108.36 29.77,108.36 29.76,108.37 29.76,106.52 29.49,106.25 29.49,108.32 29.64,108.47 29.98,108.47 30.4,108.05 30.11,108.05 29.95,108.22 29.53,108.22 29.52,108.2 29.34,108.2 29.29,108.15 29.29,106.38 29.39,106.27
  Top 0.61: v29.88,106.13 29.88,107.85 29.9,107.86
  Bottom 0.254: 27.63,101.92 DIS2.6
  Bottom 0.61: 27.63,101.92 27.63,103.89 v29.88,106.13
BOOT0  (via drill 0.5 pad 1.02)  (1 unrouted)
  Top 0.254: IC2.44 49.8,52.82 52.02,55.04 | 52.31,55.33 v53.01,56.03 54.16,57.19 | 54.16,57.19 56.03,59.06 | 56.03,59.06 56.41,59.44 | 56.41,59.44 56.58,59.6 | 56.58,59.6 57.68,59.6 57.75,59.67 56.64,59.67 56.58,59.6 | 56.41,59.44 56.41,59.84 56.9,60.33 57.97,60.33 57.99,60.31 57.99,59.14 57.9,59.06 56.03,59.06 | 53.02,56.01 52.73,56.3 53.62,57.19 54.16,57.19 | 54.16,57.19 54.16,56.66 52.84,55.33 52.31,55.33 | 52.31,55.33 52.02,55.04 | 52.02,55.04 52.02,55.58 52.88,56.44
  Top 0.305: 57.75,59.67 57.79,59.67 57.87,59.58
  Bottom 0.254: v53.01,56.03 51.77,56.03 51.17,55.44 51.17,54.02 R2.2
  Bottom 0.305: JP6.5 87.68,53.34 88.59,52.43 | R9.1 81.92,45.65 81.72,45.45 82.09,45.45 | v53.01,56.03 55.4,58.42 64.78,58.42 66.91,60.55 85.5,60.55 88.59,57.46 88.59,52.43 | 82.32,45.11 84.2,46.99 87.76,46.99 88.59,47.82 88.59,52.43
BOOT1  (via drill 0.5 pad 1.02)
  Top 0.254: IC2.20 35.69,51.32 34.56,50.19 34.56,47.52 34.02,46.99 | 29.78,46.99 29.84,46.99 31.5,46.99 34.02,46.99 | v34.49,47 34.73,46.99 34.02,46.99
  Top 0.305: 29.84,46.99 29.84,47.62 30.86,47.62 31.5,46.99 30.86,46.36 29.84,46.36 29.84,46.74 34.54,46.74 34.54,47.24 30.1,47.24 29.97,47.37 30.86,47.37 30.86,46.61 29.97,46.61
  Bottom 0.254: 36.02,54.28 R3.2 | 34.51,47.02 v34.49,47
  Bottom 0.305: 34.51,47.02 34.54,47.05 34.54,47.12 35.88,48.45 R3.2
BOOT2  (via drill 0.5 pad 1.02)
  Top 0.254: IC7.44 49.8,116.32 52.02,118.54 | 52.31,118.83 v53.01,119.53 54.16,120.69 | 54.16,120.69 56.03,122.56 | 56.03,122.56 56.41,122.94 | 56.41,122.94 56.58,123.1 | 56.58,123.1 57.68,123.1 57.75,123.16 56.64,123.16 56.58,123.1 | 56.41,122.94 56.41,123.34 56.9,123.82 57.97,123.82 57.99,123.81 57.99,122.64 57.9,122.56 56.03,122.56 | 53.02,119.51 52.73,119.8 53.62,120.69 54.16,120.69 | 54.16,120.69 54.16,120.16 52.84,118.83 52.31,118.83 | 52.31,118.83 52.02,118.54 | 52.02,118.54 52.02,119.07 52.88,119.94
  Top 0.305: 57.75,123.16 57.79,123.16 57.87,123.08
  Bottom 0.254: v53.01,119.53 51.77,119.53 51.17,118.94 51.17,117.52 R18.2
  Bottom 0.305: JP10.5 87.68,116.84 88.59,115.93 | 82.09,108.95 81.72,108.95 81.92,109.15 R26.1 82.21,108.72 82.32,108.61 84.2,110.49 87.5,110.49 88.59,111.58 88.59,115.93 | v53.01,119.53 55.4,121.92 64.78,121.92 66.91,124.05 85.5,124.05 88.59,120.96 88.59,115.93
BOOT3  (via drill 0.5 pad 1.02)
  Top 0.254: IC7.20 35.69,114.82 34.56,113.69 34.56,111.02 34.02,110.49 | 29.78,110.49 29.84,110.49 31.5,110.49 34.02,110.49 | v34.49,110.5 34.73,110.49 34.02,110.49
  Top 0.305: 29.84,110.49 29.84,111.12 30.86,111.12 31.5,110.49 30.86,109.86 29.84,109.86 29.84,110.24 34.54,110.24 34.54,110.74 30.1,110.74 29.97,110.87 30.86,110.87 30.86,110.11 29.97,110.11
  Bottom 0.254: 36.02,117.78 R19.2 | 34.51,110.52 v34.49,110.5
  Bottom 0.305: 34.51,110.52 34.54,110.55 34.54,110.62 35.88,111.95 R19.2
C1
  Top 0.254: IC7.2 45.43,121.05 46.71,122.33 52.62,122.33 53.82,123.53 54.15,123.86 | 54.15,123.86 54.15,125.55 JP14.3 | 54.44,124.83 54.44,124.16 54.15,123.86
C2
  Top 0.254: IC7.3 44.93,121.27 46.48,122.82 49.92,122.82 50.23,122.82 | 50.23,122.82 51.44,124.02 JP14.2 | 51.8,124.68 51.8,123.33 51.3,122.82 50.23,122.82
C3  (1 unrouted)
  Top 0.254: IC7.4 44.43,121.6 46.3,123.47 47.95,123.47 48.22,123.47 | 48.65,125.73 JP14.1 48.85,125.69 48.85,123.95 48.37,123.47 48.22,123.47 | 48.22,123.47 48.55,123.8 | 49.17,124.59 49.17,123.91 48.73,123.47 48.12,123.47
C13
  Top 0.254: IC2.2 45.43,57.55 46.71,58.83 52.62,58.83 53.82,60.03 54.15,60.36 | 54.15,60.36 54.15,62.05 JP3.3 | 54.44,61.33 54.44,60.66 54.15,60.36
C14
  Top 0.254: IC2.3 44.93,57.77 46.48,59.32 49.92,59.32 50.23,59.32 | 50.23,59.32 51.44,60.52 JP3.2 | 51.8,61.18 51.8,59.83 51.3,59.32 50.23,59.32
C15  (1 unrouted)
  Top 0.254: IC2.4 44.43,58.1 46.3,59.97 47.95,59.97 48.22,59.97 | 48.65,62.23 JP3.1 48.85,62.19 48.85,60.45 48.37,59.97 48.22,59.97 | 48.22,59.97 48.55,60.3 | 49.17,61.09 49.17,60.41 48.73,59.97 48.12,59.97
CTS  (via drill 0.5 pad 1.02)
  Top 0.254: 74.02,37.21 73.97,37.16 73.97,36.83 72.14,36.83 arc90 72.1,36.79
  Top 0.305: IC1.11 65,28.25 66.28,28.25 68.68,30.65 68.68,33.38 72.1,36.79 72.52,37.21 v73.91,37.21
  Bottom 0.254: 75.75,47.05 75.22,47.05 | 75.22,47.05 74.23,47.05 74.18,47 | 74.22,42.23 73.42,43.03 73.42,46.25 74.18,47 | 78.17,48.26 78.17,47.66 76.82,47.66 76.16,47 74.18,47 | 78.12,48.15 78.12,48.82 78.07,48.87 77.04,48.87 75.22,47.05
  Bottom 0.305: JP1.3 76.96,48.26 75.75,47.05 | v73.91,37.21 73.95,37.25 | 73.95,37.25 74.22,37.52 74.22,38.93 | 74.22,38.93 74.22,42.23 | 73.95,37.17 73.85,37.17 73.69,37.34 73.67,37.34 73.62,37.39 73.62,38.33 74.22,38.93 | 73.95,37.25 73.95,38.35 arc-90 74.05,38.46
CTS1  (via drill 0.5 pad 1.02)
  Top 0.254: 74.02,100.71 73.97,100.66 73.97,100.33 72.14,100.33 arc90 72.1,100.29
  Top 0.305: IC5.11 65,91.75 66.28,91.75 68.68,94.14 68.68,96.88 72.1,100.29 72.52,100.71 v73.91,100.71
  Bottom 0.254: 75.75,110.55 75.22,110.55 | 75.22,110.55 74.23,110.55 74.18,110.5 | 74.22,105.73 73.42,106.53 73.42,109.75 74.18,110.5 | 78.17,111.76 78.17,111.16 76.82,111.16 76.16,110.5 74.18,110.5 | 78.12,111.65 78.12,112.32 78.07,112.37 77.04,112.37 75.22,110.55
  Bottom 0.305: JP13.3 76.96,111.76 75.75,110.55 | v73.91,100.71 73.95,100.75 | 73.95,100.75 74.22,101.02 74.22,102.42 | 74.22,102.42 74.22,105.73 | 73.95,100.67 73.85,100.67 73.69,100.84 73.67,100.84 73.62,100.89 73.62,101.83 74.22,102.42 | 73.95,100.75 73.95,101.85 arc-90 74.05,101.96
CTS/RTS
  Bottom 0.813: JP1.2 80.24,45.72 R9.2
CTS/RTS1
  Bottom 0.813: JP13.2 80.24,109.22 R26.2
D+
  Top 0.305: IC1.15 70.9,26.26 70.8,26.16 70.8,24.32 71.37,23.75 X2.3
D+1
  Top 0.305: IC5.15 70.9,89.75 70.8,89.66 70.8,87.82 71.37,87.25 X1.3
D-
  Top 0.305: X2.2 70.65,22.95 70.04,23.56 70.04,26.35 70.59,26.91 IC1.16
D-1
  Top 0.305: X1.2 70.65,86.45 70.04,87.06 70.04,89.85 70.59,90.41 IC5.16
DTR_F
  Top 0.305: IC1.2 62.31,34.05 R8.2
DTR_F1
  Top 0.305: IC5.2 62.31,97.56 R25.2
GND  (via drill 0.5 pad 1.02, 0.5 pad 1.27, 3.2)  (5 unrouted)
  Top 0.254: C1.2 50,47.55 50,46.6 49.36,45.97 46.06,45.97 45.43,46.6 IC2.35 45.43,50.78 | C5.2 38.57,45.16 37.48,45.16 36.87,45.77 36.87,49.37 37.32,49.82 IC2.23 44.47,49.82 45.43,50.78 | IC2.8 42.43,54.98 43.1,54.31 46.18,54.31 | 46.18,54.31 47.66,54.31 IC2.47 48.46,54.32 49.55,55.41 49.55,57.22 50.09,57.76 50.99,57.76 v51.03,57.8 | 45.43,50.78 45.43,53.56 46.18,54.31
  Top 0.305: 49.55,55.41 49.55,56.91 C2.2 | IC1.26 IC1.25 71.22,32.76 70.61,32.14 70.61,30.67 71.14,30.14 72.19,30.14 | 72.19,28.19 IC1.18 73.51,28.2 73.99,28.69 76.21,28.69 77.32,27.58 77.32,25.73 77.72,25.32 79.72,25.32 X2.5 | IC1.7 63.7,30.8 63.25,30.35 63.25,27.11 C21.1 | 37.32,49.82 36.83,49.33 36.83,44.58 35.18,42.93 v34.54,42.93 | 62.66,22.64 63.75,23.74 64,23.74 63.32,23.06 63.32,22.82 63.54,23.04 63.54,23.09 | 37.21,43.61 37.44,43.84 37.64,43.84 37.71,43.9 37.71,44.82 37.48,44.59 37.48,44.22 37.07,44.63 37.07,45.01 36.98,45.1 36.98,45.39 37.26,45.11 37.26,44.58 | 38.34,45.45 38.2,45.59 37.01,45.59 | 72.19,30.14 IC1.21 | 72.19,30.14 75.55,30.14 v78,32.59 | 79.36,25.38 79.36,28.05 79.77,28.46
  Top 0.406: 75.06,36.7 74.17,35.81 74.17,33.53 73.79,33.15 72.6,33.15 IC1.25
  Top 0.61: C21.1 C22.1 C25.1 C24.1
  Top 0.813: v32.55,55.91 32.64,55.99 C12.2 | 79.77,28.46 85.15,28.46 85.38,28.23 85.38,19.37 85.69,19.06 79.83,19.06 79.63,19.27 | 79.87,25.69 79.87,27.38 79.82,27.43
  Top 1.016: C11.- 34.9,7.94 63.35,7.94 64.01,7.28 | C27.2 29.84,27.3 31.11,28.58 | 31.11,28.58 38.1,28.58 IC6.6 | IC6.5 41.5,18.57 42.8,17.27 47.5,17.27 49.28,15.49 49.28,9.27 51.31,7.24 63.46,7.24 C13.- 64.01,7.28 | 64.01,7.28 74.51,7.28 75.06,6.73 75.06,7.15 C26.- | IC6.3 38.1,19.43 v37.47,18.8 | C8.2 C7.2 | D2.A 28.58,28.58 31.11,28.58
  Bottom 0.254: 31.81,63.82 31.62,63.63 | v51.03,57.8 49.92,57.8 49.55,57.43 49.55,53.12 | 51.99,52.56 51.6,52.56 51.78,52.39 52.77,52.39 | 52.82,53.39 52.82,53.43 | 52.82,53.43 52.82,53.77 R2.1 | 52.59,53.43 52.82,53.43
  Bottom 0.305: v34.54,42.93 36.07,44.45 37.97,44.45 39.37,45.85 C4.2 | v78,32.59 79.06,32.59 79.17,32.7 80.25,32.7 82.88,30.07 82.88,25.64 82.61,25.38 79.19,25.38 79.13,25.32 79.72,25.32 X2.5
  Bottom 0.61: 30.92,64.33 21.78,64.33 JP8.16
  Bottom 0.813: R3.1 C6.2 32.89,56.32 32.22,57 | 32.22,57 32.13,57.09 32.13,63.12 31.62,63.63 30.92,64.33 | v32.55,55.91 32.22,56.24 32.22,57
  Bottom 1.016: v37.47,18.8 32.77,18.8 25.4,26.16 D2.A | JP8.16 JP8.14 JP8.12 | JP8.12 19.68,56.62 19.69,56.62 JP8.10 | JP8.12 JP8.8 JP8.6 JP8.4 JP8.2 | JP9.8 JP9.6 JP9.4 JP9.2 | C4.2 C3.2 | 15.11,38.24 DIS1.1 | BAT.1 10.42,38.36 10.42,42.29 R10.A
  Bottom 1.27: C10.2 47.14,49.91 47.08,49.97 45.72,49.97 C9.2 45.52,49.91 45.43,49.82 | 40.92,49.82 39.46,49.82 C4.2
  other vias: 84.45,7.33 9.46,7.34
  pour Bottom (isolate 0.406): 5.08,65.41 5.21,3.94 89.53,3.81 89.41,65.41
  pour Top (isolate 0.406): 5.08,65.41 5.21,3.94 89.53,3.81 89.41,65.41
GND1  (via drill 0.5 pad 1.02, 0.5 pad 1.27, 3.2)  (5 unrouted)
  Top 0.254: C15.2 50,111.05 50,110.1 49.36,109.47 46.06,109.47 45.43,110.1 IC7.35 45.43,114.28 | C19.2 38.57,108.66 37.48,108.66 36.87,109.27 36.87,112.87 37.32,113.32 IC7.23 44.47,113.32 45.43,114.28 | IC7.8 42.43,118.48 43.1,117.81 46.18,117.81 | 46.18,117.81 47.66,117.81 IC7.47 48.46,117.82 49.55,118.91 49.55,120.72 50.09,121.26 50.99,121.26 v51.03,121.3 | 45.43,114.28 45.43,117.06 46.18,117.81
  Top 0.305: 49.55,118.91 49.55,120.41 C16.2 | IC5.26 IC5.25 71.22,96.25 70.61,95.64 70.61,94.17 71.14,93.64 72.19,93.64 | 72.19,91.69 IC5.18 73.51,91.7 73.99,92.19 76.21,92.19 77.32,91.08 77.32,89.23 77.72,88.82 79.72,88.82 X1.5 | IC5.7 63.7,94.31 63.25,93.85 63.25,90.61 C35.1 | 37.32,113.32 36.83,112.83 36.83,108.08 35.18,106.43 v34.54,106.43 | 62.66,86.14 63.75,87.24 64,87.24 63.32,86.56 63.32,86.32 63.54,86.54 63.54,86.59 | 37.21,107.11 37.44,107.34 37.64,107.34 37.71,107.4 37.71,108.32 37.48,108.09 37.48,107.72 37.07,108.13 37.07,108.51 36.98,108.6 36.98,108.89 37.26,108.61 37.26,108.08 | 38.34,108.95 38.2,109.09 37.01,109.09 | 72.19,93.64 IC5.21 | 72.19,93.64 75.55,93.64 v78,96.09 | 79.36,88.88 79.36,91.55 79.77,91.96
  Top 0.406: 75.06,100.2 74.17,99.31 74.17,97.03 73.79,96.65 72.6,96.65 IC5.25
  Top 0.61: C35.1 C36.1 C38.1 C37.1
  Top 0.813: v32.55,119.41 32.64,119.49 C31.2 | 79.77,91.96 85.15,91.96 85.38,91.73 85.38,82.87 85.69,82.56 79.83,82.56 79.63,82.77 | 79.87,89.19 79.87,90.88 79.82,90.93
  Top 1.016: C40.- 34.9,71.44 63.35,71.44 64.01,70.78 | C43.2 29.84,90.81 31.11,92.08 | 31.11,92.08 38.1,92.08 IC8.6 | IC8.5 41.5,82.07 42.8,80.77 47.5,80.77 49.28,78.99 49.28,72.77 51.31,70.74 63.46,70.74 C41.- 64.01,70.78 | 64.01,70.78 74.51,70.78 75.06,70.23 75.06,70.65 C39.- | IC8.3 38.1,82.93 v37.47,82.3 | C30.2 C29.2 | D1.A 28.58,92.08 31.11,92.08
  Bottom 0.254: 31.81,127.32 31.62,127.13 | v51.03,121.3 49.92,121.3 49.55,120.93 49.55,116.62 | 51.99,116.06 51.6,116.06 51.78,115.89 52.77,115.89 | 52.82,116.89 52.82,116.93 | 52.82,116.93 52.82,117.27 R18.1 | 52.59,116.93 52.82,116.93
  Bottom 0.305: v34.54,106.43 36.07,107.95 37.97,107.95 39.37,109.35 C18.2 | v78,96.09 79.06,96.09 79.17,96.2 80.25,96.2 82.88,93.57 82.88,89.14 82.61,88.88 79.19,88.88 79.13,88.82 79.72,88.82 X1.5
  Bottom 0.61: 30.92,127.83 21.78,127.83 JP11.16
  Bottom 0.813: R19.1 C28.2 32.89,119.82 32.22,120.5 | 32.22,120.5 32.13,120.59 32.13,126.62 31.62,127.13 30.92,127.83 | v32.55,119.41 32.22,119.74 32.22,120.5
  Bottom 1.016: v37.47,82.3 32.77,82.3 25.4,89.66 D1.A | JP11.16 JP11.14 JP11.12 | JP11.12 19.68,120.12 19.69,120.12 JP11.10 | JP11.12 JP11.8 JP11.6 JP11.4 JP11.2 | JP12.8 JP12.6 JP12.4 JP12.2 | C18.2 C17.2 | 15.11,101.74 DIS2.1 | BAT1.1 10.42,101.86 10.42,105.78 R27.A
  Bottom 1.27: C33.2 47.14,113.41 47.08,113.47 45.72,113.47 C32.2 45.52,113.41 45.43,113.32 | 40.92,113.32 39.46,113.32 C18.2
  other vias: 84.45,70.83 9.46,70.84
  pour Bottom (isolate 0.406): 5.08,128.91 5.21,67.44 89.53,67.31 89.41,128.91
  pour Top (isolate 0.406): 5.08,128.91 5.21,67.44 89.53,67.31 89.41,128.91
N$1
  Top 1.016: R5.1 LED2.C
N$2
  Top 1.016: R4.1 LED3.C
N$3  (via drill 0.5 pad 1.02)
  Top 1.016: 22.35,17.27 22.48,17.14 | 22.48,17.14 22.78,16.85 | 22.78,16.85 25.95,13.68 POW.A | 22.78,16.85 22.31,16.38 v22.31,14.12 25.51,14.12 25.73,13.91 | 22.22,17.14 22.48,17.14
  Top 1.27: S1.2 16.46,26.72 22.22,20.95
  Top 2.184: 22.22,20.95 22.22,17.14
  Bottom 1.016: BAT.2 15.63,35.56 20.55,30.64 J1.3 22.29,14.15 v22.31,14.12
N$4
  Top 0.305: R5.2 77.22,38.1 75.82,36.7 75.82,32.38 74.87,31.43 72.23,31.43 IC1.23
N$5
  Top 0.305: R4.2 76.76,34.53 76.76,32.36 75.2,30.8 IC1.22
N$6
  Top 0.406: R12.1 LED4.C
N$7
  Bottom 0.61: R10.S 15.66,47.62 17.1,46.19 17.1,43.17 20.03,40.24 20.03,38.4 DIS1.3
N$8
  Top 1.016: R13.1 LED5.C
N$9
  Top 1.016: R14.1 LED6.C
N$10
  Top 1.016: R15.1 LED7.C
N$11
  Top 1.016: R16.1 LED8.C
N$15
  Bottom 0.61: T1.C 52.96,40.7
  Bottom 0.813: 52.96,40.7 52.96,38.49 DIS1.16
N$16
  Bottom 0.813: 61.82,48.36 62.15,48.36 62.98,47.54
N$17
  Top 1.016: D2.C 32.38,12.06 37.47,12.06 39.37,12.06 | 39.37,12.06 39.8,12.5 IC6.4 | L1.1 43.92,12.06 39.37,12.06
N$19
  Top 0.254: 38.66,53.33 36.6,53.33
N$20
  Top 1.016: POW.C R11.1
N$23
  Top 0.254: 38.85,54.32 31.79,54.32 31.5,54.61 29.76,54.61
N$27
  Top 0.254: 38.82,54.83 32.23,54.83 31.17,55.89 28.85,55.89 | 28.85,55.89 28.61,55.89 27.28,54.56 | 28.24,55.31 28.27,55.31 28.85,55.89
N$28
  Top 0.254: 38.52,53.82 36.77,53.82
N$29
  Top 0.254: 32.78,49.52 29.82,49.52 29.81,49.51
N$30
  Bottom 0.813: 63.21,47.64 63.21,45.15 63.18,45.12
N$31
  Bottom 0.254: 55.4,53.38 55.4,53.67 55.42,53.7 56.3,53.7 56.62,53.38 56.27,53.03 55.45,53.03 55.4,53.09 55.4,53.24 56.26,53.24 56.33,53.3 56.33,53.49 56.31,53.48 55.51,53.48
N$32
  Top 0.254: 40.42,56.64 39.93,57.14 29.83,57.14
N$33
  Top 0.254: 40.94,56.48 40.94,57.59 40.12,58.42 28.85,58.42 | 28.85,58.42 28.58,58.42 27.24,57.09 | 28.16,57.94 28.37,57.94 28.85,58.42
N$34  (1 unrouted)
  Top 0.254: 29.9,59.67 29.87,59.69 | 41.43,56.43 41.43,57.8 39.55,59.68 29.86,59.68
N$35
  Bottom 0.254: 70.13,45.05 70.13,45.09 70.62,45.58 69.94,46.27 68.95,46.27 68.95,45.25 69.67,44.53 70.04,44.89 70.04,45.01 69.1,45.95 69.1,45.48 69.77,44.81 69.77,44.86 69.89,44.97 69.89,45.03 69.23,45.7 69.23,45.58 69.02,45.38 69.06,45.38 69.69,44.76
N$36
  Top 0.254: 44.44,47.5 44.44,46.34 45.75,45.03 53.49,45.03 56.72,48.26 59.12,48.26 60.36,47.02
N$37
  Bottom 0.254: 69.25,46.18 70.09,45.34 70.27,45.52
N$46
  Top 0.254: 47.64,49.31 55.26,49.31 56.73,50.79 59.08,50.79 60.34,49.53
N$47
  Top 0.254: 47.85,49.82 54.09,49.82 54.36,49.82 | 54.36,49.82 56.6,52.07 57.87,52.07 57.89,52.06 | 55.36,50.76 55.36,50.78 55.11,51.03 56.78,52.7 58.05,52.7 58.04,52.69 58.04,51.44 56.41,51.44 54.8,49.82 54.36,49.82
N$48
  Bottom 0.254: 69.47,46.14 69.77,46.14 70.37,45.54 70.14,45.54 69.62,46.06
N$49
  Top 0.254: 47.78,50.83 52.92,50.83 56.71,54.61 56.72,54.62 57.77,54.62
N$50
  Top 0.254: 47.87,51.32 52.22,51.32 56.78,55.88 59.07,55.88 60.34,54.61
N$51
  Top 0.254: 47.78,51.82 51.41,51.82 55.59,55.99 | 55.59,55.99 56.69,57.1 57.82,57.1 57.85,57.12 | 55.59,55.99 55.31,56.27 56.82,57.78 57.92,57.78 57.84,57.7 57.84,56.52 56.64,56.52 55.45,55.32 54.9,55.32 54.67,55.09 54.67,55.63 55.49,56.44
N$52
  Top 0.254: 47.88,52.31 50.67,52.31 56.77,58.41 59.07,58.41 60.33,57.15
N$53
  Top 0.254: 47.87,53.31 48.91,53.31 56.54,60.95 59.11,60.95 60.36,59.7
N$64
  Top 0.254: 47.87,53.82 48.65,53.82 57.07,62.23 57.78,62.23
N$65
  Top 0.305: 68.71,23.75 68.71,23.88 68.83,24 68.83,23.62
N$66
  Bottom 0.254: 62.67,55.27 62.67,55.61 62.65,55.64 66.5,55.64 70.23,51.91 70.23,51.82 69.77,51.36 66.18,54.95 62.57,54.95 62.67,55.06 62.67,55.17 66.62,55.17 69.99,51.8 69.94,51.8 69.76,51.63
N$67
  Top 0.254: 32.77,50.17 32.91,50.17 33.16,50.42 33.16,50.2 32.7,49.75 30.01,49.75 29.97,49.71 29.97,49.91 30.06,50 32.72,50 32.74,49.97 33.19,49.97 | 38.75,52.32 34.23,52.32 33.19,51.28 33.19,49.97 | 33.19,49.97 33.19,49.91 | 33.19,49.91 32.79,49.52 | 33.19,49.91 33.19,49.44 32.65,48.91 29.79,48.91 29.97,49.09 29.97,49.28 30.21,49.52 33.06,49.52 32.66,49.12 29.98,49.12 30.17,49.31 32.87,49.31
  Top 0.305: 29.84,49.4 29.84,50.04 29.97,50.17 32.77,50.17
N$68
  Top 0.254: 32.56,50.05 33.17,50.66 33.17,50.81
N$69
  Bottom 0.254: 69.69,51.68 69.69,51.75 66.28,55.16 66.4,55.16 66.61,55.37 62.61,55.37 62.57,55.33
N$80
  Bottom 1.016: 78.21,40.98 78.21,43.24 78.14,43.31
N$86
  Top 0.406: R34.1 LED1.C
N$87
  Top 0.254: 27.13,49.52 28.18,50.57 28.18,50.65 28.12,50.58 27.93,50.58 27.08,49.73 27.08,49.59 27.66,49.01 27.67,49.01 28.13,49.47 28.13,50.36 | 27.2,49.51 27.24,49.54 27.24,50.18 27.85,50.79 | JP4.6 28.13,50.36 | 28.13,50.36 28.56,50.79 | 28.56,50.79 31.84,50.79 33.87,52.82 38.61,52.82 | 27.85,50.79 28.56,50.79 | 27.99,50.66 27.98,50.66 27.85,50.79 | 27.85,50.79 27.58,50.79 26.62,49.82
N$88
  Top 0.254: 27.98,50.08 27.69,49.78 | 27.69,49.78 27.48,49.58 27.48,49.33 27.63,49.17 27.69,49.23 27.69,49.78
N$89
  Top 0.254: 26.63,49.75 26.66,49.75 27.3,49.1 27.32,49.1
N$90
  Top 0.254: 25.74,46.89 25.74,47.19 25.7,47.23 26.58,47.23 27.23,47.88 28.17,47.88 28.49,48.2 28.49,47.28 27.55,46.34 27.55,46.47 27.36,46.66 27.36,46.91 28.26,47.81 28.26,47.52 27.45,46.71 27.58,46.71 27.6,46.7 27.63,46.7 28.33,47.4
N$91
  Top 0.254: 27.67,47.57 27.18,47.57 26.8,47.19 27.29,47.19 27.79,47.69 27.22,47.69 27.14,47.61 27.14,47.31 27.19,47.26 27.19,47.3 27.39,47.5
N$92
  Bottom 0.406: 58.37,34.62 64.31,34.62 65.33,35.64 65.33,40.4 65.38,40.45 64.92,40.45 64.87,40.4 64.87,35.73 64.07,34.93 58.46,34.93 58.41,34.98
N$93
  Top 0.254: 28.32,45.58 27.38,44.64 27.16,44.64 28.07,45.54 28.07,45.57 27.99,45.49 27.79,45.49 26.86,44.56 26.86,42.75 26.99,42.88 27.7,42.88 27.81,42.99 27.81,44.88 27.67,44.74 27.67,43
N$94
  Bottom 0.406: 69.49,39.8 69.27,39.8 69.27,41.24 68.63,41.87
N$95
  Top 0.254: 30.35,44.73 31.67,44.73 32.03,44.37 31.77,44.37 31.6,44.55 30.68,44.55
N$96
  Bottom 0.254: 75.65,47.18 75.65,47.19 76.91,48.45 76.91,47.98 76.12,47.19
N$97
  Top 0.254: 27.36,51.99 27.94,51.99 27.94,52.44 28.87,53.36 | 27.27,52.05 27.27,52.2 26.9,52.56 27.7,53.36 28.56,53.36 | 38.86,53.82 32.82,53.82 32.36,53.36 28.87,53.36 | 28.87,53.36 28.56,53.36 | 28.56,53.36 27.27,52.07
N$98
  Top 0.254: 28.13,53.21 28.13,53.12 27.29,52.29 27.29,52.44 27.19,52.54 27.19,52.56 27.89,53.26 27.95,53.26 27.95,52.41 27.66,52.12 27.66,52.87 27.81,53.02 27.81,52.93 27.38,52.5
N$99
  Top 0.254: 29.74,54.62 29.74,54.1 29.86,53.99 31.56,53.99 31.88,54.31 31.81,54.31 30.94,55.18 29.59,55.18 29.54,55.13 29.54,54.53 29.91,54.17 31.41,54.17 31.56,54.32 29.91,54.32 29.88,54.34 31.27,54.34 31.37,54.45 29.95,54.45 29.63,54.76 31.15,54.76 31.17,54.78 29.96,54.78 29.73,55 30.95,55 31.03,54.93
N$100
  Top 0.254: 29.78,52.07 29.78,52.69
N$101
  Top 0.254: 36.59,53.33 33.21,53.33 32.59,52.7 | 32.59,52.7 32.09,52.21 | 32.02,52.13 29.79,52.13 29.78,52.12 | 29.77,52.7 32.59,52.7 | 32.09,52.23 32.09,52.21 | 32.09,52.21 32.02,52.13 | 32.02,52.13 31.33,51.45 29.62,51.45 29.68,51.51 29.68,51.88 29.86,52.06 31.67,52.06 32.17,52.55 32.18,52.55 32.11,52.48 29.84,52.48 30.01,52.31 30.06,52.31 30.07,52.32 31.67,52.32 31.5,52.15 31.5,51.77 31.38,51.65 29.77,51.65 29.9,51.78 29.9,51.88 29.91,51.87 31.36,51.87
N$102
  Top 0.254: 27.6,54.27 27.66,54.2 27.77,54.2 28.33,54.76 28.33,55.6 27.39,55.6 26.87,55.08 26.87,54.99 27.6,54.27 | 27.6,54.27 27.6,54.78 28.14,55.32 28.14,54.83 27.74,54.42 27.74,54.72 28.03,55.02 28.03,55.35 27.89,55.49 27.89,55.46 27.22,54.79 27.22,54.92 27.03,55.11 27.24,55.11 27.61,55.47
N$103
  Top 0.254: 29.79,57.12 29.79,57.76 29.82,57.78 31.72,57.78 32.36,57.15 31.62,57.15 30.95,56.48 29.81,56.48 29.67,56.62 29.67,56.82 29.78,56.93 31.11,56.93 31.17,56.98 31.17,56.91 30.94,56.68 29.86,56.68 29.79,56.74 29.79,57.3 29.95,57.45 31.88,57.45 32.03,57.3 30.04,57.3 30,57.26 30,57.62 31.74,57.62
N$104
  Top 0.254: 27.34,57.04 27.24,57.04 27.22,57.06 27.23,57.06 | 27.23,57.06 27.33,56.96 | 27.33,56.96 27.65,56.64 28.35,57.34 28.35,58.17 27.42,58.17 26.76,57.51 26.78,57.51 27.23,57.06 | 27.33,56.96 27.33,57 28.14,57.81 28.14,57.47 28.21,57.4 28.09,57.4 27.57,56.88 27.57,56.92 27.06,57.43 27.38,57.43 27.98,58.03 27.5,58.03 27,57.53 27.29,57.53 27.63,57.87
N$105
  Top 0.254: 29.83,59.65 29.83,60.3 29.84,60.31 31.86,60.31 32.47,59.7 31.85,59.08 29.86,59.08 29.87,59.09 29.87,59.4 30.02,59.55 32.11,59.55 31.88,59.32 29.97,59.32 29.97,59.97 30.07,59.87 32.12,59.87
N$106
  Top 0.254: 32.12,60 32.02,60.1 29.82,60.1
N$107
  Top 0.254: 57.73,61.71 57.77,61.67 57.77,61.59 56.46,61.59 56.46,61.81 57.52,62.86 58.6,62.86 58.85,63.12 58.85,62.38 58.06,61.59 58.06,62.12 58.69,62.74 58.69,62.47 58.13,61.91 56.97,61.91 56.82,61.76 57.9,61.76 58.01,61.87 58.01,61.95 57.97,61.99 57.19,61.99 57.1,62.08 57.54,62.08 58.2,62.74 57.89,62.74 | 57.89,62.74 57.63,62.74 57.25,62.36 57.51,62.36 57.89,62.74
N$108
  Top 0.254: 59.66,60.34 59.66,59.46 59.83,59.3
N$109
  Top 0.254: 59.89,59.3 60.76,59.3 61.01,59.55
N$110
  Top 0.254: 61.27,60.76 61.27,60.77 59.51,60.77 59.46,60.72 59.49,60.72 60.4,59.8 60.4,60.06 59.84,60.62 61.02,60.62 61.04,60.6 61.04,60.54 60.8,60.3 60.1,60.3 59.97,60.43 60.87,60.43 60.88,60.44
N$111
  Top 0.254: 60.72,60.34 60.72,59.8 60.86,59.67 | 60.86,59.67 60.86,60.2 | 60.86,59.67 60.86,59.59 60.8,59.53
N$112
  Top 0.254: 60.06,60.39 60.06,59.6 60.03,59.58 60.03,60.05 59.87,60.21 59.87,59.46 59.88,59.45 60.66,59.45 60.76,59.55 60.76,59.97 60.47,60.26 60.47,59.72 60.6,59.58 60.13,59.58
N$113
  Top 0.254: 56.4,59.3 57.75,59.3 57.76,59.31 57.76,59.39 57.8,59.42 57.8,59.39 | 57.8,59.23 57.8,59.39 | 57.8,59.39 57.75,59.44 56.64,59.44 56.62,59.41
N$114
  Top 0.254: 56.53,59.79 57.73,59.79 57.82,59.88 57.82,60.17 57.81,60.19 57,60.19 56.74,59.93 57.57,59.93 57.7,60.06
N$115
  Top 0.254: 56.48,59.7 55.99,59.22 55.99,59.04
N$116
  Top 0.254: 54.79,55.47 54.83,55.47 56.86,57.51 57.01,57.51 57.19,57.68 57.57,57.68 57.72,57.53 57.72,57.23 57.62,57.12 57.52,57.12 56.97,57.67 56.97,57.34 56.81,57.17 57.01,57.17 57.48,57.64 57.48,57.28 57.53,57.23 57.53,56.92 57.7,56.76 56.55,56.76 55.31,55.51 55.31,55.54 56.72,56.95 57.63,56.95 57.71,57.02
N$117
  Top 0.254: 47.56,57.09 46.88,57.09 46.39,57.57 46.39,57.58 46.9,58.09 47.27,58.09 47.78,57.58 47.54,57.58 47.13,57.99 47.02,57.99 46.6,57.57 46.72,57.57 47.02,57.28 47.02,57.77 47.04,57.8 47.07,57.8 47.26,57.61
N$118
  Bottom 0.406: 76.99,47.89 77.93,47.89 77.98,47.94 77.98,47.99 77.97,48.01 77.01,48.01 76.95,47.94 76.95,48.49 77.06,48.6 77.94,48.6 77.98,48.56
N$119
  Top 0.254: 59.63,57.81 59.63,56.95 59.97,56.6
N$120